# Altium PCB PWm_IO.PcbDoc (part 2 of 2)
Units mm, origin at the board's own origin, x right, y up, seen from the top; angles counter-clockwise.
Board outline 35.56 x 59.94 mm, 2 copper layers (Top Layer, Bottom Layer); 16 components, 40 nets, 122 pads, 24 vias.
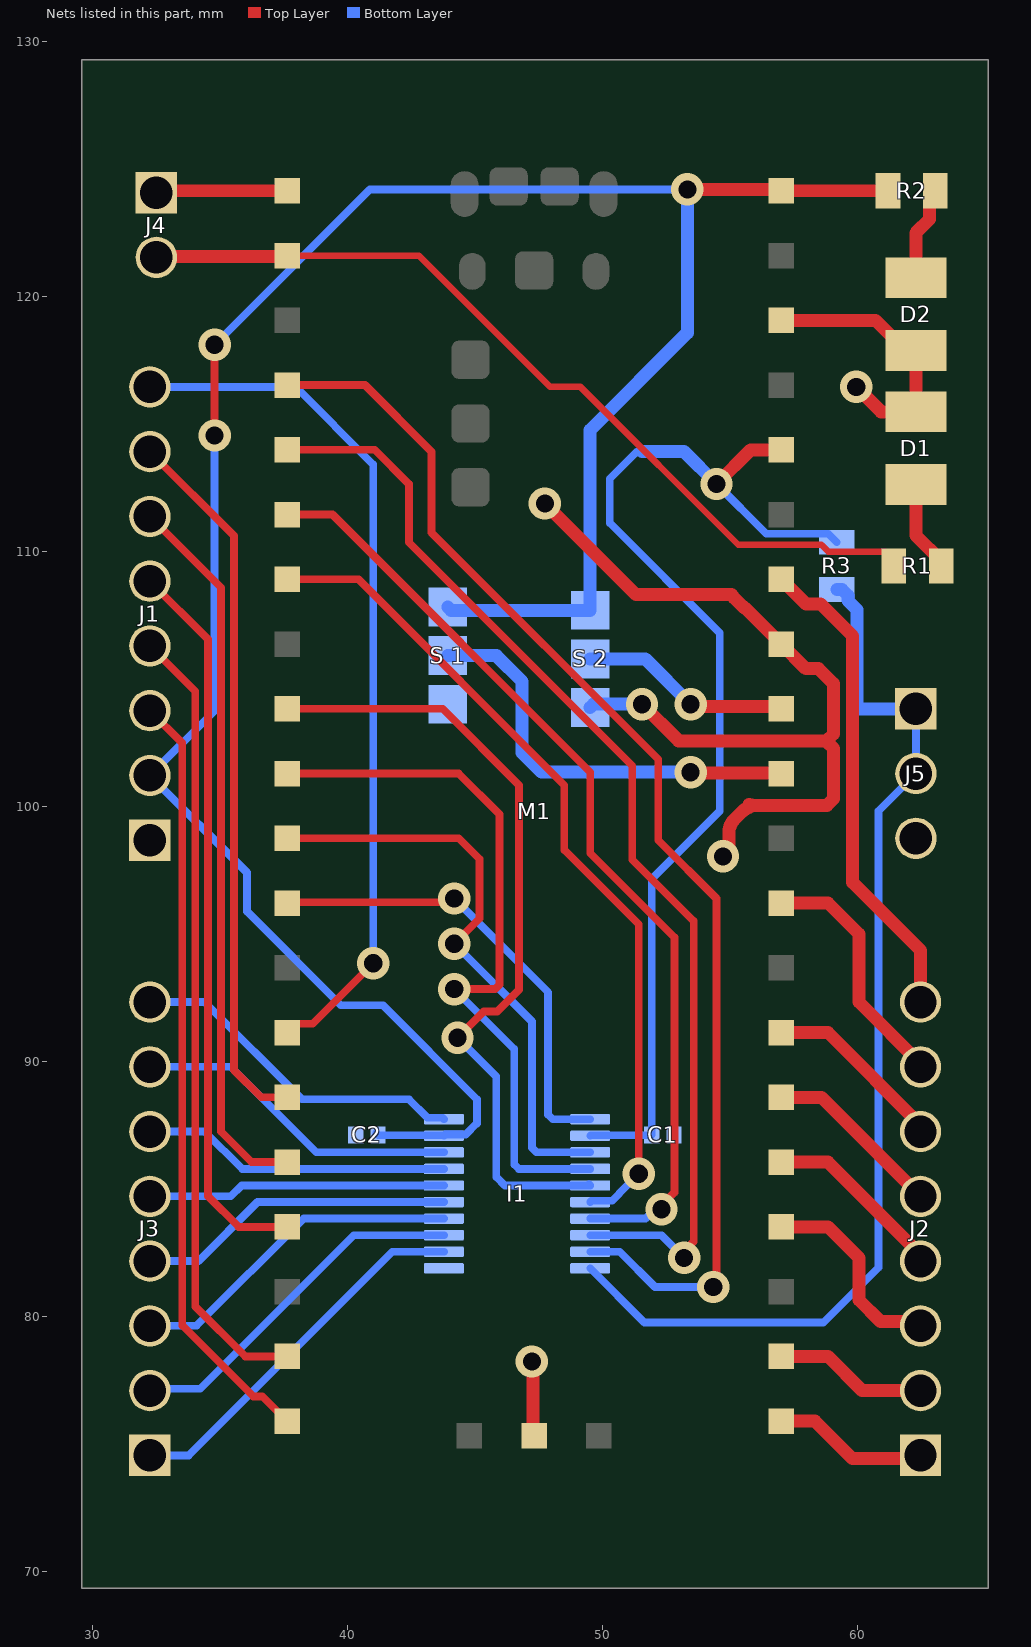
[diagram p2: the nets of this part, all layers, seen from the top]

## Part data
C1 C2: library part CMP-00017-2, "Generic SMD Capacetor"
D1 D2: library part CMP-00018-3, "Generic SMD LED"
I1: library part CMP-00042-2, "8-bit bidirectional voltage-level shifter"
J1 J2 J3: library part CMP-00039-1, "8 Pin Breakout Header"
J4: library part CMP-00041-1, "2Pin  Breakout Header"
J5: library part CMP-00043-1, "3 Pin Breakout Header"
M1: library part CMP-00035-2
R1 R2 R3: library part CMP-00019-2, "Generic SMD Resistor"
"S 1" "S 2": library part CMP-00040-1, "This is a SMD Pin Soldering Selector"

## Via types
v1: diameter 1.27, hole 0.711, Top Layer to Bottom Layer, 20 vias
v2: diameter 3, hole 2.2, Top Layer to Bottom Layer, 4 vias

## Nets (pads, with @x,y where several pads share a name; then routed paths per layer and width w, separated by ;. In a path a pad name is that pad's centre, name@x,y a point inside that pad or via, vN(x,y) a via of type N, cw(c..) or ccw(c..) an arc to the next point about the centre after c; other vN are vias at no path point)
3V3: C1.1 I1.2 M1.36 R3.1 | length 45
  Top Layer w0.508: v1(54.483,112.649) 55.826,113.992 M1.36@57.021,113.992
  Bottom Layer w0.305: I1.2@49.53,87.085 49.548,87.103 51.924,87.103 C1.1@51.943,87.122 51.943,97.155 54.61,99.822 54.61,106.807 50.292,111.125 50.292,112.854 51.357,113.919 51.562,113.919 ; v1(54.483,112.649) 56.431,110.701 58.87,110.701 R3.1@59.203,110.369
  Bottom Layer w0.508: 51.562,113.919 53.213,113.919 v1(54.483,112.649)
+5: "S 1.2" "S 2.2" C2.1 I1.19 J1.2 M1.40 R2.1 | length 94.8
  Top Layer w0.305: v1(34.798,114.554) v1(34.798,118.11)
  Top Layer w0.508: v1(53.34,124.206) 56.967,124.206 M1.40@57.021,124.152 ; M1.40@57.058,124.115 M1.40@57.021,124.152 ; R2.1@61.208,124.152 M1.40@57.021,124.152
  Bottom Layer w0.305: v1(34.798,114.554) 34.798,103.759 J1.2@32.258,101.219 36.068,97.409 36.068,95.885 39.751,92.202 41.402,92.202 45.085,88.519 45.085,87.572 44.651,87.138 43.843,87.138 I1.19@43.79,87.085 43.772,87.103 41.223,87.103 C2.1@41.204,87.122 C2.1@41.134,87.192 ; v1(34.798,118.11) 40.894,124.206 v1(53.34,124.206)
  Bottom Layer w0.508: 43.942,107.823 44.069,107.696 49.53,107.696 49.53,114.768 53.34,118.578 v1(53.34,124.206)
GND: "S 1.1" "S 2.1" C1.2 C2.2 D1.K D2.K I1.11 J1.1 J5.3 M1.33 M1.38 M1.D2 | length 48.8
  Top Layer w0.508: v1(47.244,78.232) 47.288,78.188 47.288,75.366 M1.D2@47.331,75.322 ; v1(47.752,111.887) 51.32,108.319 55.074,108.319 55.074,108.31 55.096,108.288 55.096,108.278 55.12,108.254 55.12,108.246 55.145,108.221 55.145,108.216 55.172,108.189 55.172,108.187 55.496,107.863 55.498,107.863 55.525,107.836 55.53,107.836 55.555,107.811 55.563,107.811 55.587,107.787 55.597,107.787 55.619,107.765 55.628,107.765 M1.33@57.021,106.372 57.985,105.408 58.487,105.408 59.075,104.82 59.075,102.844 58.809,102.578 ; v1(51.562,104.013) 52.997,102.578 58.809,102.578 ; v1(54.737,98.044) 54.967,98.274 54.967,98.981 54.968,98.982 54.968,99.021 54.971,99.024 54.971,99.059 54.977,99.065 54.977,99.099 54.984,99.106 54.984,99.137 54.994,99.147 54.994,99.175 55.006,99.187 55.006,99.213 55.02,99.227 55.02,99.249 55.036,99.265 55.036,99.285 55.054,99.303 55.054,99.32 55.074,99.34 55.074,99.354 55.096,99.376 55.096,99.386 55.12,99.41 55.12,99.418 55.145,99.443 55.145,99.448 55.172,99.475 55.172,99.477 55.496,99.801 55.498,99.801 55.525,99.828 55.53,99.828 55.555,99.853 55.563,99.853 55.587,99.877 55.597,99.877 55.619,99.899 55.633,99.899 55.653,99.919 55.67,99.919 55.688,99.937 55.708,99.937 55.724,99.953 55.746,99.953 55.76,99.967 55.76,100.077 55.786,100.077 55.798,100.065 55.826,100.065 55.836,100.055 55.867,100.055 55.874,100.048 55.908,100.048 55.914,100.042 55.949,100.042 55.952,100.039 55.991,100.039 55.992,100.038 58.809,100.038 59.075,100.304 59.075,102.28 58.809,102.546 58.809,102.578 ; M1.38@57.021,119.072 60.719,119.072 61.904,117.887 D2.K@62.304,117.887 D1.K@62.304,115.483 60.942,115.483 v1(59.966,116.459)
  Bottom Layer w0.508: 49.53,103.886 49.657,104.013 v1(51.562,104.013)
NetD1_A: D1.A R1.1 | length 3.6
  Top Layer w0.508: D1.A@62.304,112.633 62.304,110.634 63.294,109.643 R1.1@63.294,109.438
NetD2_A: D2.A R2.2 | length 3.7
  Top Layer w0.508: D2.A@62.304,120.737 62.304,122.502 62.837,123.035 62.837,123.921 R2.2@63.068,124.152
NetI1_1: I1.1 M1.12 | length 18.4
  Top Layer w0.305: M1.12@37.641,96.212 37.671,96.242 44.045,96.242 v1(44.196,96.393)
  Bottom Layer w0.305: v1(44.196,96.393) 47.879,92.71 47.879,87.914 48.058,87.735 I1.1@49.53,87.735
NetI1_3: I1.3 M1.11 | length 23.2
  Top Layer w0.305: M1.11@37.641,98.752 44.377,98.752 45.183,97.946 45.183,95.602 v1(44.196,94.615)
  Bottom Layer w0.305: v1(44.196,94.615) 47.244,91.567 47.244,86.614 47.423,86.435 I1.3@49.53,86.435
NetI1_4: I1.4 M1.10 | length 28.4
  Top Layer w0.305: M1.10@37.641,101.292 44.377,101.292 45.974,99.695 45.974,93.016 45.795,92.837 v1(44.196,92.837)
  Bottom Layer w0.305: v1(44.196,92.837) 46.549,90.484 46.549,85.964 46.728,85.785 I1.4@49.53,85.785
NetI1_5: I1.5 M1.9 | length 31.5
  Top Layer w0.305: M1.9@37.641,103.832 43.742,103.832 46.736,100.838 46.736,92.81 45.888,91.962 45.353,91.962 v1(44.323,90.932)
  Bottom Layer w0.305: v1(44.323,90.932) 45.847,89.408 45.847,85.471 46.183,85.135 I1.5@49.53,85.135 I1.5@49.477,85.188
NetI1_6: I1.6 M1.7 | length 33
  Top Layer w0.305: M1.7@37.641,108.912 40.44,108.912 48.514,100.838 48.514,98.298 51.435,95.377 v1(51.435,85.598)
  Bottom Layer w0.305: I1.6@49.53,84.485 49.583,84.538 50.391,84.538 50.667,84.814 50.667,84.83 v1(51.435,85.598)
NetI1_7: I1.7 M1.6 | length 37.7
  Top Layer w0.305: M1.6@37.641,111.452 39.424,111.452 49.53,101.346 49.53,98.171 52.832,94.869 52.832,84.862 52.324,84.354 v1(52.324,84.201)
  Bottom Layer w0.305: I1.7@49.53,83.835 51.697,83.835 52.063,84.201 v1(52.324,84.201)
NetI1_8: I1.8 M1.5 | length 44.5
  Top Layer w0.305: M1.5@37.641,113.992 41.075,113.992 42.418,112.649 42.418,110.363 51.181,101.6 51.181,97.917 53.594,95.504 53.594,82.938 53.213,82.557 v1(53.213,82.296)
  Bottom Layer w0.305: I1.8@49.53,83.185 52.324,83.185 v1(53.213,82.296)
NetI1_9: I1.9 M1.4 | length 49.6
  Top Layer w0.305: M1.4@37.641,116.532 40.694,116.532 43.307,113.919 43.307,110.744 52.197,101.854 52.197,98.679 54.483,96.393 54.483,81.28 v1(54.356,81.153)
  Bottom Layer w0.305: I1.9@49.53,82.535 50.688,82.535 52.07,81.153 v1(54.356,81.153)
NetI1_10: I1.10 J5.1 J5.2 R3.2 | length 43
  Bottom Layer w0.305: I1.10@49.53,81.885 51.659,79.756 58.674,79.756 60.833,81.915 60.833,99.821 J5.2@62.304,101.292 J5.1@62.304,103.832
  Bottom Layer w0.508: R3.2@59.203,108.509 59.408,108.509 59.639,108.278 59.639,108.073 59.994,107.717 59.994,103.832 J5.1@62.304,103.832
NetI1_12: I1.12 J3.1 | length 14.8
  Bottom Layer w0.305: J3.1@32.258,74.549 33.782,74.549 41.768,82.535 I1.12@43.79,82.535
NetI1_13: I1.13 J3.2 | length 14.1
  Bottom Layer w0.305: J3.2@32.258,77.089 32.331,77.162 34.236,77.162 40.259,83.185 I1.13@43.79,83.185
NetI1_14: I1.14 J3.3 | length 13.3
  Bottom Layer w0.305: J3.3@32.258,79.629 34.084,79.629 38.29,83.835 I1.14@43.79,83.835
NetI1_15: I1.15 J3.4 | length 12.5
  Bottom Layer w0.305: J3.4@32.258,82.169 34.163,82.169 36.479,84.485 I1.15@43.79,84.485
NetI1_16: I1.16 J3.5 | length 11.7
  Bottom Layer w0.305: J3.5@32.258,84.709 35.433,84.709 35.859,85.135 I1.16@43.79,85.135
NetI1_17: I1.17 J3.6 | length 12.1
  Bottom Layer w0.305: J3.6@32.258,87.249 34.417,87.249 35.881,85.785 I1.17@43.79,85.785
NetI1_18: I1.18 J3.7 | length 12.9
  Bottom Layer w0.305: J3.7@32.258,89.789 35.433,89.789 38.787,86.435 39.884,86.435 ; 39.884,86.435 41.65,86.435 ; 41.65,86.435 I1.18@43.79,86.435
NetI1_20: I1.20 J3.8 | length 13.4
  Bottom Layer w0.305: J3.8@32.258,92.329 34.417,92.329 38.227,88.519 42.418,88.519 43.149,87.788 43.737,87.788 I1.20@43.79,87.735
NetJ1_3: J1.3 M1.20 | length 30.3
  Top Layer w0.305: J1.3@32.258,103.759 33.528,102.489 33.528,79.647 36.312,76.863 36.67,76.863 M1.20@37.641,75.892
NetJ1_4: J1.4 M1.19 | length 31.1
  Top Layer w0.305: J1.4@32.258,106.299 34.036,104.521 34.036,80.391 35.995,78.432 M1.19@37.641,78.432
NetJ1_5: J1.5 M1.17 | length 28.7
  Top Layer w0.305: J1.5@32.258,108.839 34.541,106.556 34.541,84.71 35.739,83.512 M1.17@37.641,83.512
NetJ1_6: J1.6 M1.16 | length 28.4
  Top Layer w0.305: J1.6@32.258,111.379 35.052,108.585 35.052,87.249 36.249,86.052 M1.16@37.641,86.052
NetJ1_7: J1.7 M1.15 | length 28.1
  Top Layer w0.305: J1.7@32.258,113.919 35.56,110.617 35.56,89.662 36.63,88.592 M1.15@37.641,88.592
NetJ1_8: J1.8 M1.14 | length 34.1
  Top Layer w0.305: M1.14@37.641,91.132 37.989,91.48 38.648,91.48 v1(41.021,93.853)
  Bottom Layer w0.305: J1.8@32.258,116.459 37.973,116.459 41.021,113.411 v1(41.021,93.853)
NetJ2_1: J2.1 M1.21 | length 6.1
  Top Layer w0.508: M1.21@57.021,75.892 58.347,75.892 59.817,74.422 62.357,74.422 J2.1@62.484,74.549
NetJ2_2: J2.2 M1.22 | length 6
  Top Layer w0.508: M1.22@57.021,78.432 58.855,78.432 60.198,77.089 J2.2@62.484,77.089
NetJ2_3: J2.3 M1.24 | length 8
  Top Layer w0.508: M1.24@57.021,83.512 58.855,83.512 60.071,82.296 60.071,80.645 60.912,79.804 62.309,79.804 J2.3@62.484,79.629
NetJ2_4: J2.4 M1.25 | length 7.2
  Top Layer w0.508: M1.25@57.021,86.052 58.855,86.052 62.484,82.423 J2.4@62.484,82.169
NetJ2_5: J2.5 M1.26 | length 7.1
  Top Layer w0.508: M1.26@57.021,88.592 58.601,88.592 J2.5@62.484,84.709
NetJ2_6: J2.6 M1.27 | length 7.2
  Top Layer w0.508: M1.27@57.021,91.132 58.855,91.132 62.484,87.503 J2.6@62.484,87.249
NetJ2_7: J2.7 M1.29 | length 9.8
  Top Layer w0.508: M1.29@57.021,96.212 58.855,96.212 60.071,94.996 60.071,92.329 62.484,89.916 J2.7@62.484,89.789
NetJ2_8: J2.8 M1.34 | length 19.2
  Top Layer w0.508: M1.34@57.021,108.912 57.985,107.948 58.564,107.948 59.817,106.694 59.817,97.028 62.484,94.361 J2.8@62.484,92.329
NetJ4_1: J4.1 M1.1 | length 5.2
  Top Layer w0.508: J4.1@32.512,124.079 32.585,124.152 M1.1@37.641,124.152
NetJ4_2: J4.2 M1.2 R1.2 | length 34.1
  Top Layer w0.254: M1.2@37.641,121.612 42.805,121.612 47.958,116.459 49.149,116.459 55.337,110.271 58.601,110.271 58.87,110.001 61.076,110.001 61.434,109.643 R1.2@61.434,109.438
  Top Layer w0.508: J4.2@32.512,121.539 32.548,121.575 37.604,121.575 M1.2@37.641,121.612
NetM1_31: "S 1.3" M1.31 | length 16.6
  Top Layer w0.508: v1(53.467,101.346) 53.494,101.319 56.994,101.319 M1.31@57.021,101.292
  Bottom Layer w0.508: 43.942,105.918 45.847,105.918 46.863,104.902 46.863,102.108 47.625,101.346 v1(53.467,101.346)
NetM1_32: "S 2.3" M1.32 | length 8.3
  Top Layer w0.508: v1(53.467,104.013) 53.558,103.922 56.931,103.922 M1.32@57.021,103.832
  Bottom Layer w0.508: 49.53,105.791 51.689,105.791 v1(53.467,104.013)
pads on no net: M1.3 M1.8 M1.13 M1.18 M1.23 M1.28 M1.30 M1.35 M1.37 M1.39 M1.A M1.B M1.C M1.D M1.D1 M1.D3 M1.TP1 M1.TP2 M1.TP3 M1.TP4 M1.TP5 M1.TP6
copper on no net:
  other v2: 31.496,71.12 63.119,71.247 31.623,127.381 63.246,127.381

## Polygon pours and split planes (outlines as drawn)
GND on Bottom Layer "NONET_L-01_P-001" (solid, remove dead copper, pour order 0): 30.988,125.603 30.988,73.279 63.881,73.279 63.881,125.603

## Other copper
Bottom Layer:
  text "TR" at 43.434,75.946 h1.52

## Silkscreen, mask and mechanical layers (free items; w line width, h text height)
Top Overlay:
  lines w0.254: 60.96,99.949 63.627,99.949
  text "TX" at 35.787,122.666 h1.52 r90
  text "PWR" at 60.579,120.523 h1.52 r90
  text "S" at 34.29,115.824 h1.52
  text "GP1" at 60.637,111.52 h1.52 r90
  text "I" at 34.163,110.49 h1.52
  text "s" at 34.163,108.077 h1.52
  text "EN" at 60.833,105.918 h1.52
  text "L" at 34.163,105.537 h1.52
  text "C" at 34.163,102.997 h1.52
  text "5" at 34.163,100.457 h1.52
  text "G" at 34.163,97.917 h1.52
  text "GND" at 59.309,95.377 h1.52
  text "PWM In  1- 8" at 60.706,74.295 h1.52 r90
  text "PWM Out  1- 8" at 35.56,74.041 h1.52 r90
Bottom Overlay:
  lines w0.254: 37.465,121.92 56.007,121.92 ; 41.91,113.919 41.91,124.968 ; 45.339,104.013 48.006,104.013 ; 45.339,107.823 48.133,107.823 ; 46.672,102.298 46.672,104.013 ; 46.736,107.823 46.736,109.474 ; 46.99,113.919 46.99,124.968 ; 37.465,113.919 56.007,113.919 ; 37.465,113.919 37.465,116.586 ; 37.465,113.919 56.007,113.919 ; 37.465,113.919 37.465,124.968 56.007,124.968 56.007,113.919 ; 37.465,116.586 56.007,116.586 ; 37.465,116.586 56.007,116.586 ; 37.465,116.586 37.465,119.126 56.007,119.126 56.007,116.586 ; 56.007,113.919 56.007,116.586
  text "B" at 40.005,122.809 h1.52
  text "A" at 44.831,122.809 h1.52
  text "Out F" at 54.991,122.682 h1.52
  text "L" at 40.005,119.761 h1.52
  text "50Hz" at 55.118,119.761 h1.52
  text "L" at 44.831,119.634 h1.52
  text "L" at 40.005,117.136 h1.52
  text "125Hz" at 55.118,117.115 h1.52
  text "H" at 44.831,117.009 h1.52
  text "H" at 40.005,114.512 h1.52
  text "250Hz" at 55.118,114.469 h1.52
  text "L" at 44.831,114.385 h1.52
  text "H" at 47.244,109.601 h1.52
  text "A" at 42.037,105.156 h1.52
  text "B" at 52.451,105.156 h1.52
  text "L" at 47.117,100.203 h1.52
  text "PWM IO Board" at 56.515,85.09 h1.52 r270
  text "V 1.0" at 56.388,75.819 h1.52